# EAGLE board clock_v0.1 (EAGLE 9.3.2)
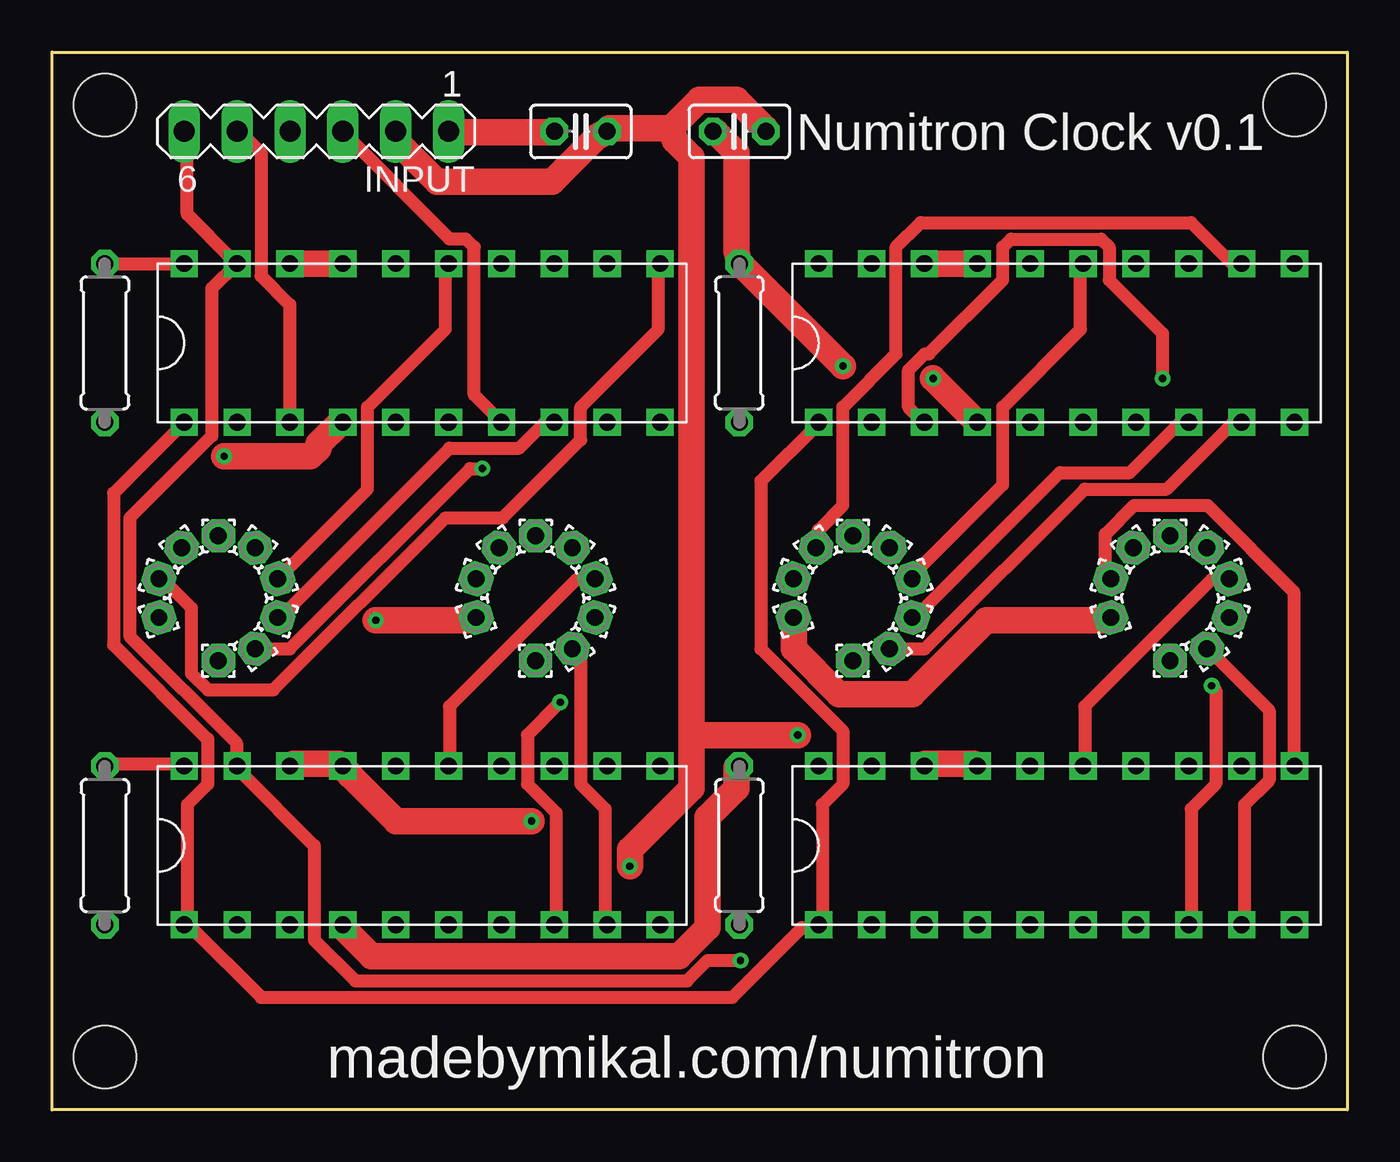
[diagram p0: board, top side]
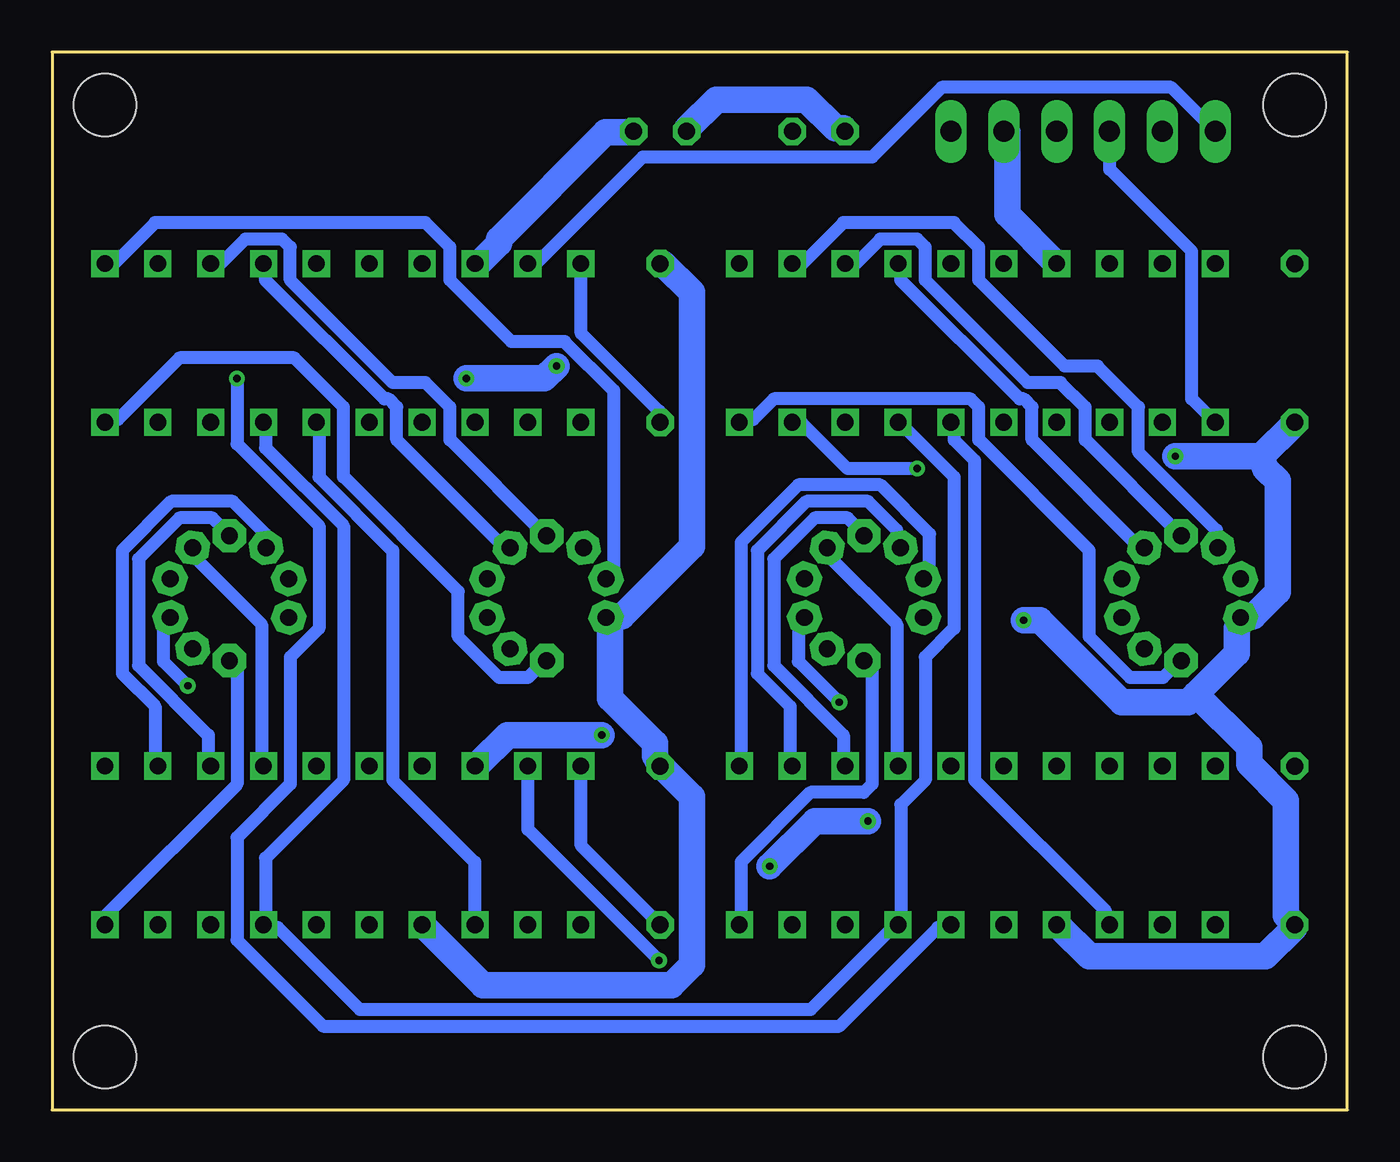
[diagram p1: board, bottom side, seen from below]

Size 62.23 x 50.8 mm. Coordinates in mm from the lower left corner, seen from the top.
Outline: 0,0 0,50.8 62.23,50.8 62.23,0 0,0
Copper layers (1*16): Top 0.035mm / dielectric 1.5mm / Bottom 0.035mm
Design rules "default": minimum track width 6mil, minimum drill 0.35mm, track to track 6mil, track to pad 6mil, pad to pad 6mil, via to via 6mil, smd to smd 6mil, copper to edge 40mil, drill to drill 6mil, minimum pad ring 10mil, minimum via ring 8mil, stop-mask expansion 4mil, vias tented up to drill 0mil, thermal gap 10mil
Net classes: 0 default: width 0.635 mm; 1 vcc: width 1.27 mm; 2 ground: width 1.27 mm
Holes 3 mm at 2.54,2.54 2.54,48.26 59.69,2.54 59.69,48.26

## Footprints (pad centres in the part's own frame; a part is rotated, then mirrored left to right if it is on the bottom)
RCL_C025-025X050 = drill 0.813 octagon: 1 -1.27,0; 2 1.27,0
1,6/0,8 = drill 0.813 pad 1.6 octagon: 1 0,0
CON-LSTB_MA06-1 = drill 1.016 long: 1 -6.35,0; 2 -3.81,0; 3 -1.27,0; 4 1.27,0; 5 3.81,0; 6 6.35,0
RCL_0207/7 = drill 0.813 octagon: 1 -3.81,0; 2 3.81,0
TPIC6B595N_PDIP-20 = drill 0.8 square: P$1 -3.81,1.27; P$2 -3.81,3.81; P$3 -3.81,6.35; P$4 -3.81,8.89; P$5 -3.81,-1.27; P$6 -3.81,-3.81; P$7 -3.81,-6.35; P$8 -3.81,-8.89; P$9 -3.81,-11.43; P$10 -3.81,11.43; P$11 3.81,1.27; P$12 3.81,3.81; P$13 3.81,6.35; P$14 3.81,8.89; P$15 3.81,11.43; P$16 3.81,-1.27; P$17 3.81,-3.81; P$18 3.81,-6.35; P$19 3.81,-8.89; P$20 3.81,-11.43

## Placement (x,y rotation side)
C1  0.1uF  [RCL_C025-025X050]  33.02,46.99 0 top
C2  47uF  [RCL_C025-025X050]  25.4,46.99 0 top
CMN1  [1,6/0,8]  5.13,23.65 198 top
CMN3  [1,6/0,8]  20.37,23.65 198 top
CMN5  [1,6/0,8]  35.61,23.65 198 top
CMN7  [1,6/0,8]  50.85,23.65 198 top
DEC1  [1,6/0,8]  5.13,25.5 162 top
DEC3  [1,6/0,8]  20.37,25.5 162 top
DEC5  [1,6/0,8]  35.61,25.5 162 top
DEC7  [1,6/0,8]  50.85,25.5 162 top
INPUT  [CON-LSTB_MA06-1]  12.7,46.99 180 top
R1  10K  [RCL_0207/7]  2.54,36.83 270 top
R3  10K  [RCL_0207/7]  2.54,12.7 270 top
R5  10K  [RCL_0207/7]  33.02,36.83 90 top
R7  10K  [RCL_0207/7]  33.02,12.7 90 top
SEGA1  [1,6/0,8]  6.22,27 126 top
SEGA3  [1,6/0,8]  21.46,27 126 top
SEGA5  [1,6/0,8]  36.7,27 126 top
SEGA7  [1,6/0,8]  51.94,27 126 top
SEGB1  [1,6/0,8]  7.99,27.57 90 top
SEGB3  [1,6/0,8]  23.23,27.57 90 top
SEGB5  [1,6/0,8]  38.47,27.57 90 top
SEGB7  [1,6/0,8]  53.71,27.57 90 top
SEGC1  [1,6/0,8]  9.75,27 144 top
SEGC3  [1,6/0,8]  24.99,27 144 top
SEGC5  [1,6/0,8]  40.23,27 144 top
SEGC7  [1,6/0,8]  55.47,27 144 top
SEGD1  [1,6/0,8]  10.84,25.5 18 top
SEGD3  [1,6/0,8]  26.08,25.5 18 top
SEGD5  [1,6/0,8]  41.32,25.5 18 top
SEGD7  [1,6/0,8]  56.56,25.5 18 top
SEGE1  [1,6/0,8]  10.84,23.65 342 top
SEGE3  [1,6/0,8]  26.08,23.65 342 top
SEGE5  [1,6/0,8]  41.32,23.65 342 top
SEGE7  [1,6/0,8]  56.56,23.65 342 top
SEGF1  [1,6/0,8]  9.75,22.15 306 top
SEGF3  [1,6/0,8]  24.99,22.15 306 top
SEGF5  [1,6/0,8]  40.23,22.15 306 top
SEGF7  [1,6/0,8]  55.47,22.15 306 top
SEGG1  [1,6/0,8]  7.99,21.57 270 top
SEGG3  [1,6/0,8]  23.23,21.57 270 top
SEGG5  [1,6/0,8]  38.47,21.57 270 top
SEGG7  [1,6/0,8]  53.71,21.57 270 top
U$1  [TPIC6B595N_PDIP-20]  17.78,36.83 90 top
U$3  [TPIC6B595N_PDIP-20]  17.78,12.7 90 top
U$5  [TPIC6B595N_PDIP-20]  48.26,36.83 90 top
U$7  [TPIC6B595N_PDIP-20]  48.26,12.7 90 top

## Library data of the parts
C1 C2 = v0.4; SPICEPREFIX: C
CMN1 CMN3 CMN5 CMN7 DEC1 DEC3 DEC5 DEC7 SEGA1 SEGA3 SEGA5 SEGA7 SEGB1 SEGB3 SEGB5 SEGB7 SEGC1 SEGC3 SEGC5 SEGC7 SEGD1 SEGD3 SEGD5 SEGD7 SEGE1 SEGE3 SEGE5 SEGE7 SEGF1 SEGF3 SEGF5 SEGF7 SEGG1 SEGG3 SEGG5 SEGG7 = wirepad
INPUT = v0.4; OC_FARNELL: unknown; OC_NEWARK: unknown
R1 R3 R5 R7 = v0.4; SPICEPREFIX: R
U$1 U$3 U$5 U$7 = v0.4

## Nets
G: INPUT.6 U$1.P$14 U$3.P$14 U$5.P$14 U$7.P$14
GND [ground]: C1.2 C2.2 INPUT.2 U$1.P$12 U$1.P$13 U$3.P$12 U$3.P$13 U$5.P$12 U$5.P$13 U$7.P$12 U$7.P$13
N$1: R1.1 U$1.P$15
N$2: SEGA1.1 U$1.P$19
N$3: SEGB1.1 U$1.P$18
N$4: SEGC1.1 U$1.P$17
N$5: SEGD1.1 U$1.P$16
N$6: SEGE1.1 U$1.P$7
N$7: SEGF1.1 U$1.P$8
N$8: SEGG1.1 U$1.P$9
N$9: DEC1.1 U$1.P$20
N$10: U$1.P$5 U$3.P$3
N$11: U$3.P$5 U$5.P$3
N$12: U$5.P$5 U$7.P$3
N$19: R3.1 U$3.P$15
N$20: SEGA3.1 U$3.P$19
N$21: SEGB3.1 U$3.P$18
N$22: SEGC3.1 U$3.P$17
N$23: SEGD3.1 U$3.P$16
N$24: SEGE3.1 U$3.P$7
N$25: SEGF3.1 U$3.P$8
N$26: SEGG3.1 U$3.P$9
N$27: DEC3.1 U$3.P$20
N$37: R5.1 U$5.P$15
N$38: SEGA5.1 U$5.P$19
N$39: SEGB5.1 U$5.P$18
N$40: SEGC5.1 U$5.P$17
N$41: SEGD5.1 U$5.P$16
N$42: SEGE5.1 U$5.P$7
N$43: SEGF5.1 U$5.P$8
N$44: SEGG5.1 U$5.P$9
N$45: DEC5.1 U$5.P$20
N$55: R7.1 U$7.P$15
N$56: SEGA7.1 U$7.P$19
N$57: SEGB7.1 U$7.P$18
N$58: SEGC7.1 U$7.P$17
N$59: SEGD7.1 U$7.P$16
N$60: SEGE7.1 U$7.P$7
N$61: SEGF7.1 U$7.P$8
N$62: SEGG7.1 U$7.P$9
N$63: DEC7.1 U$7.P$20
RCK: INPUT.4 U$1.P$10 U$3.P$10 U$5.P$10 U$7.P$10
SER_IN: INPUT.5 U$1.P$3
SRCK: INPUT.3 U$1.P$6 U$3.P$6 U$5.P$6 U$7.P$6
VCC [vcc]: C1.1 C2.1 CMN1.1 CMN3.1 CMN5.1 CMN7.1 INPUT.1 R1.2 R3.2 R5.2 R7.2 U$1.P$2 U$3.P$2 U$5.P$2 U$7.P$2

## Tracks (layer width: path | path; a pad name or v marks a point on that pad's centre or on a via)
G  (via drill 0.35)
  Top 0.635: v33.07,7.18 31.5,7.18 30.51,6.19 14.57,6.19 12.6,8.16 12.6,12.69 9.05,16.23 U$3.P$14 8.86,16.62 8.86,17.61 3.74,22.73 3.74,28.43 7.68,32.37 7.68,39.46 8.86,40.64 U$1.P$14 8.66,40.84 6.5,43 6.5,46.94 INPUT.6
  Bottom 0.635: U$5.P$14 38.98,40.64 33.86,45.76 22.84,45.76 19.49,49.11 8.46,49.11 INPUT.6 | U$7.P$14 39.37,13.47 v33.07,7.18
GND  (via drill 0.35)
  Top 1.27: U$1.P$12 U$1.P$13 | U$5.P$12 U$5.P$13 | U$7.P$13 41.93,16.62 44.29,16.62 U$7.P$12 | U$3.P$13 11.61,16.62 13.78,16.62 U$3.P$12 14.37,16.03 16.54,13.87 v23.03,13.87 | 29.72,47.14 26.77,47.14 C2.2 26.18,46.74 24.02,44.58 18.5,44.58 16.54,46.55 16.54,46.94 INPUT.2 | 29.72,47.14 31.1,48.51 32.87,48.51 34.25,47.14 C1.2 | v27.76,11.7 27.76,12.49 30.71,15.44 30.71,18 | 30.71,18 30.71,45.76 29.92,46.55 29.72,47.14 | 30.71,18 v35.83,18
  Bottom 1.27: INPUT.2 16.34,46.94 16.34,43 U$1.P$12 | v23.03,13.87 25.59,13.87 v27.76,11.7 | v35.83,18 40.35,18 41.73,16.62 U$7.P$13 | U$5.P$13 41.73,40.64 40.75,41.62 40.75,41.82 35.63,46.94 34.45,46.94 C1.2
N$1
  Top 0.635: R1.1 U$1.P$15
N$2
  Bottom 0.635: U$1.P$19 26.18,40.64 24.21,42.61 18.9,42.61 17.72,41.43 17.72,39.85 13.58,35.72 12.01,35.72 10.04,33.75 10.04,31.59 6.3,27.84 6.3,27.06 SEGA1.1
N$3
  Bottom 0.635: U$1.P$18 23.62,40.64 22.44,41.82 20.67,41.82 20.28,41.43 20.28,39.85 15.35,34.93 13.78,34.93 12.6,33.75 12.6,32.18 8.07,27.65 SEGB1.1
N$4
  Bottom 0.635: U$1.P$17 21.46,40.64 21.46,39.85 15.75,34.14 15.55,34.14 15.16,33.75 15.16,32.18 9.84,26.86 SEGC1.1
N$5
  Top 0.635: U$1.P$16 18.9,40.64 18.9,37.49 15.16,33.75 15.16,29.81 11.02,25.68 SEGD1.1
N$6
  Top 0.635: U$1.P$7 24.02,32.96 23.62,32.96 22.44,31.78 19.09,31.78 11.02,23.71 SEGE1.1
N$7  (via drill 0.35)
  Top 0.635: v20.67,30.8 20.08,30.8 11.42,22.14 9.84,22.14 SEGF1.1
  Bottom 0.635: v20.67,30.8 24.02,30.8 26.18,32.96 26.57,32.96 U$1.P$8
N$8
  Bottom 0.635: U$1.P$9 29.13,33.16 28.54,33.16 27.56,34.14 18.11,34.14 17.72,33.75 17.72,32.18 12.4,26.86 12.4,22.73 10.43,20.76 8.86,20.76 8.07,21.55 SEGG1.1
N$9
  Top 0.635: U$1.P$20 29.13,40.64 29.13,37.49 25.39,33.75 25.39,32.18 21.65,28.43 18.9,28.43 10.63,20.17 7.48,20.17 6.69,20.95 6.69,24.11 5.32,25.48 DEC1.1
N$10
  Bottom 0.635: U$3.P$3 11.61,8.95 11.61,9.54 17.91,15.84 17.91,31.19 18.9,32.18 18.9,32.96 U$1.P$5
N$11  (via drill 0.35)
  Top 0.635: v53.35,35.13 53.35,37.29 50.79,39.85 50.79,41.43 50.39,41.82 46.06,41.82 45.67,41.43 45.67,39.85 42.13,36.31 41.93,36.31 41.14,35.52 41.14,33.75 41.73,33.16 U$5.P$3
  Bottom 0.635: v53.35,35.13 53.35,31.98 49.41,28.04 49.41,23.12 50.79,21.74 50.79,15.64 53.35,13.08 53.35,8.16 49.21,4.03 24.41,4.03 19.68,8.75 19.09,8.75 U$3.P$5
N$12
  Bottom 0.635: U$7.P$3 41.93,8.95 41.93,11.9 45.87,15.84 45.87,26.86 49.41,30.4 49.41,32.96 U$5.P$5
N$19
  Top 0.635: U$3.P$15 6.3,16.62 2.56,16.62 R3.1
N$20
  Bottom 0.635: U$3.P$19 26.77,16.62 26.77,19.38 28.35,20.95 28.35,26.86 25.98,29.22 23.03,29.22 21.65,27.84 21.65,27.06 SEGA3.1
N$21
  Bottom 0.635: U$3.P$18 24.21,16.62 24.21,18 27.56,21.35 27.56,26.47 25.59,28.43 24.02,28.43 23.23,27.65 SEGB3.1
N$22
  Bottom 0.635: U$3.P$17 21.65,16.62 21.65,23.32 24.8,26.47 24.8,26.86 SEGC3.1
N$23
  Top 0.635: U$3.P$16 19.09,16.62 19.09,19.38 25.2,25.48 25.98,25.48 SEGD3.1
N$24  (via drill 0.35)
  Top 0.635: v24.41,19.58 22.84,18 22.84,15.64 24.21,14.26 24.21,8.95 U$3.P$7
  Bottom 0.635: v24.41,19.58 26.38,21.55 26.38,23.32 26.18,23.51 SEGE3.1
N$25
  Top 0.635: U$3.P$8 26.57,8.95 26.57,14.46 25.39,15.64 25.39,21.74 25,22.14 SEGF3.1
N$26
  Bottom 0.635: U$3.P$9 29.13,8.95 29.13,11.9 25.79,15.25 23.23,15.25 22.84,15.64 22.84,21.35 23.03,21.55 SEGG3.1
N$27
  Bottom 0.635: U$3.P$20 29.13,16.62 29.13,27.25 26.38,30.01 22.44,30.01 20.08,27.65 20.08,25.88 20.28,25.68 DEC3.1
N$37
  Bottom 0.635: U$5.P$15 36.81,40.64 36.81,37.29 33.07,33.55 33.07,33.16 R5.1
N$38
  Top 0.635: U$5.P$19 56.69,40.64 54.72,42.61 41.73,42.61 40.55,41.43 40.55,36.31 37.99,33.75 37.99,29.03 36.81,27.84 36.81,27.06 SEGA5.1
N$39
  Bottom 0.635: U$5.P$18 54.13,40.64 52.95,41.82 51.18,41.82 50.79,41.43 50.79,39.85 45.87,34.93 44.29,34.93 43.11,33.75 43.11,32.18 38.58,27.65 SEGB5.1
N$40
  Bottom 0.635: U$5.P$17 51.97,40.64 51.97,39.85 46.26,34.14 46.06,34.14 45.67,33.75 45.67,32.18 40.35,26.86 SEGC5.1
N$41
  Top 0.635: U$5.P$16 49.41,40.64 49.41,37.49 45.67,33.75 45.67,30.01 41.34,25.68 SEGD5.1
N$42
  Top 0.635: U$5.P$7 54.53,32.96 54.13,32.96 51.77,30.6 48.42,30.6 41.34,23.51 SEGE5.1
N$43
  Top 0.635: U$5.P$8 57.09,32.96 56.69,32.96 53.54,29.81 49.61,29.81 41.93,22.14 40.35,22.14 SEGF5.1
N$44
  Bottom 0.635: U$5.P$9 59.65,33.16 59.05,33.16 56.1,36.11 50.59,36.11 48.23,33.75 48.23,30.4 42.72,24.89 42.72,22.73 40.75,20.76 39.37,20.76 38.58,21.55 SEGG5.1
N$45
  Bottom 0.635: U$5.P$20 59.25,40.64 57.28,42.61 44.29,42.61 43.11,41.43 43.11,39.85 40.16,36.9 37.6,36.9 35.24,34.54 35.24,25.88 35.43,25.68 DEC5.1
N$55
  Bottom 0.635: U$7.P$15 36.81,16.43 36.81,12.69 33.07,8.95 R7.1
N$56
  Bottom 0.635: U$7.P$19 57.28,16.62 57.28,19.38 58.86,20.95 58.86,26.86 56.5,29.22 53.54,29.22 51.97,27.65 51.97,27.06 SEGA7.1
N$57
  Bottom 0.635: U$7.P$18 54.72,16.62 54.72,18 58.07,21.35 58.07,26.47 56.1,28.43 54.53,28.43 53.74,27.65 SEGB7.1
N$58
  Bottom 0.635: U$7.P$17 52.16,16.62 52.16,23.32 55.31,26.47 55.31,26.86 SEGC7.1
N$59
  Top 0.635: U$7.P$16 49.61,16.62 49.61,19.38 55.71,25.48 56.5,25.48 SEGD7.1
N$60  (via drill 0.35)
  Top 0.635: v55.71,20.36 55.91,20.17 55.91,15.64 54.72,14.46 54.72,8.95 U$7.P$7
  Bottom 0.635: v55.71,20.36 56.89,21.55 56.89,23.32 56.69,23.51 SEGE7.1
N$61
  Top 0.635: U$7.P$8 57.28,8.95 57.28,14.66 58.46,15.84 58.46,19.18 55.51,22.14 SEGF7.1
N$62
  Bottom 0.635: U$7.P$9 59.65,8.95 59.65,9.34 53.35,15.64 53.35,21.35 53.54,21.55 SEGG7.1
N$63
  Top 0.635: U$7.P$20 59.65,16.62 59.65,24.89 55.51,29.03 51.97,29.03 50.59,27.65 50.59,25.88 50.79,25.68 DEC7.1
RCK
  Top 0.635: U$5.P$10 36.81,32.96 34.05,30.21 34.05,22.14 37.99,18.2 37.99,15.64 37.01,14.66 37.01,8.95 U$7.P$10 36.61,8.75 36.02,8.75 32.68,5.4 10.04,5.4 6.69,8.75 U$3.P$10 6.5,8.95 6.5,14.66 7.48,15.64 7.48,17.8 2.95,22.33 2.95,29.62 6.3,32.96 U$1.P$10
  Bottom 0.635: INPUT.4 11.42,46.94 11.42,45.17 7.48,41.23 7.48,34.14 6.5,33.16 U$1.P$10
SER_IN
  Top 0.635: U$1.P$3 11.42,33.16 11.42,38.67 10.04,40.05 10.04,45.96 9.05,46.94 INPUT.5
SRCK
  Top 0.635: INPUT.3 13.98,46.94 19.09,41.82 19.88,41.82 20.28,41.43 20.28,34.34 21.46,33.16 U$1.P$6
  Bottom 0.635: U$5.P$6 51.97,32.96 51.97,31.78 48.23,28.04 48.23,15.84 51.97,12.1 51.97,8.95 U$7.P$6 51.77,8.75 51.38,8.75 47.44,4.81 25.79,4.81 21.85,8.75 U$3.P$6 21.46,8.95 21.46,14.66 20.28,15.84 20.28,21.74 18.9,23.12 18.9,30.4 21.46,32.96 U$1.P$6
VCC  (via drill 0.35)
  Top 1.27: v8.27,31.39 12.4,31.39 12.79,31.78 12.79,31.98 13.78,32.96 U$1.P$2 | v15.55,23.51 20.28,23.51 CMN3.1 | CMN7.1 50.79,23.51 44.88,23.51 41.34,19.97 37.8,19.97 35.63,22.14 35.63,23.51 CMN5.1 | C2.1 24.02,46.94 19.09,46.94 INPUT.1 | v42.32,35.13 44.29,33.16 U$5.P$2 | v37.99,35.72 33.07,40.64 R5.2 32.87,41.23 32.87,45.96 31.89,46.94 C1.1 | U$3.P$2 13.98,8.75 15.35,7.37 30.12,7.37 31.5,8.75 31.5,14.06 32.87,15.44 32.87,16.43 R7.2
  Bottom 1.27: U$3.P$2 13.78,8.75 12.4,7.37 3.94,7.37 2.56,8.75 R3.2 2.95,9.34 2.95,14.85 4.72,16.62 4.72,17.41 7.28,19.97 | 4.13,31.39 v8.27,31.39 | 4.13,31.39 2.56,32.96 R1.2 | 4.13,31.39 3.94,30.8 3.35,30.21 3.35,24.89 4.53,23.71 5.12,23.71 CMN1.1 5.32,23.12 5.32,21.94 7.28,19.97 | v15.55,23.51 14.76,23.51 10.83,19.58 7.68,19.58 7.28,19.97 | U$7.P$2 44.29,8.75 41.53,5.99 32.48,5.99 31.5,6.98 31.5,15.05 32.87,16.43 R7.2 33.27,17.02 33.27,17.61 35.43,19.77 35.43,23.51 CMN5.1 34.84,23.71 31.5,27.06 31.5,39.26 32.87,40.64 R5.2 | v42.32,35.13 38.58,35.13 v37.99,35.72 | C2.1 24.21,47.14 24.61,47.14 25.98,48.51 30.32,48.51 31.69,47.14 C1.1

## Text on the board
tPlace: Numitron Clock v0.1 | madebymikal.com/numitron